# EAGLE board glowbs_3.2 (EAGLE 6.6.0)
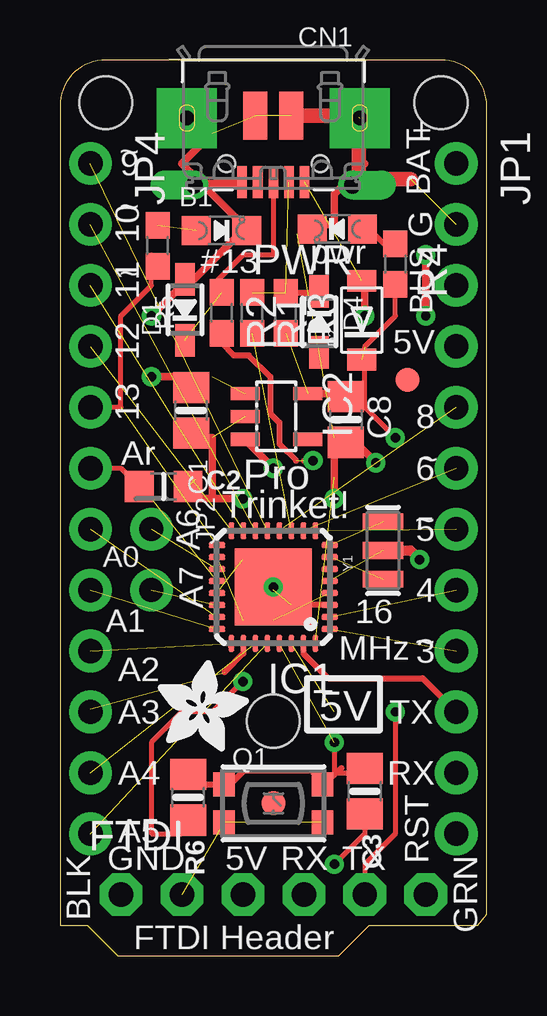
[diagram p0: board, top side]
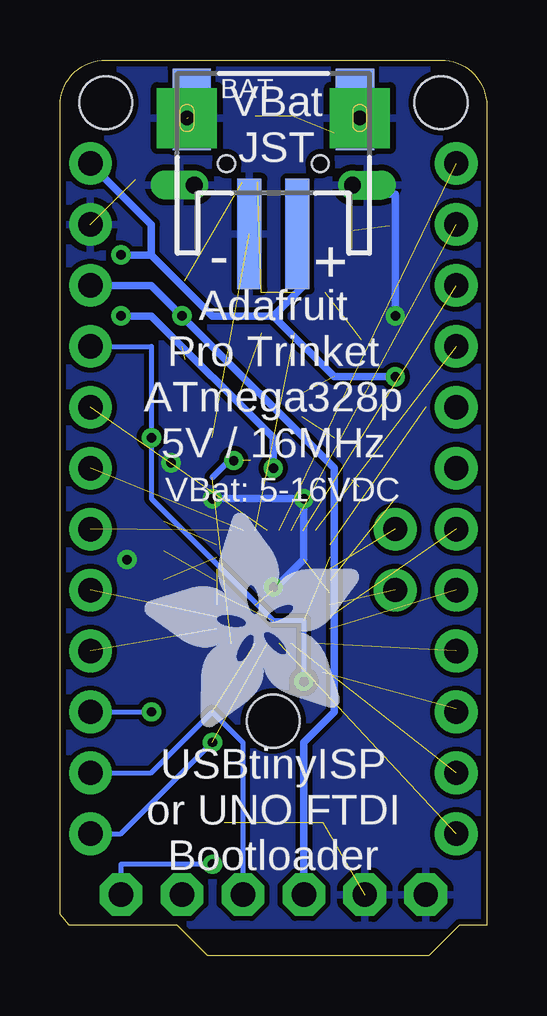
[diagram p1: board, bottom side, seen from below]

Size 17.78 x 37.34 mm. Coordinates in mm from the lower left corner, seen from the top.
Outline: 17.78,1.72 17.78,35.43 arc90 15.88,37.34 1.91,37.34 arc90 0,35.43 0,1.27 1.14,1.27 2.41,0 11.62,0 12.89,1.27 17.4,1.27 17.78,1.72
Copper layers (1*16): Top 0.035mm / dielectric 1.5mm / Bottom 0.035mm
Design rules "adafruit": minimum track width 8mil, minimum drill 15.5mil, track to track 8mil, track to pad 8mil, pad to pad 8mil, via to via 8mil, smd to smd 8mil, copper to edge 10mil, drill to drill 8mil, minimum pad ring 10mil, minimum via ring 8mil, stop-mask expansion 2mil, vias tented up to drill 20mil, thermal gap 10mil
Net classes: 1 power: width 0.305 mm
Holes 2.2 mm at 1.91,35.56 15.88,35.56 8.89,9.78

## Footprints (pad centres in the part's own frame; a part is rotated, then mirrored left to right if it is on the bottom)
CHIPLED_0805_NOOUTLINE = smd 1.2 x 1.2: A 0,-1.05; C 0,1.05
JSTPH2 = smd 1 x 4.6: 1 -1,-3.7; 2 1,-3.7 | smd 1.6 x 3.4: NC1 -3.4,1.5; NC2 3.4,1.5
0805-NO = smd 1.3 x 1.5: 1 -0.95,0; 2 0.95,0
_0805MP = smd 1.2 x 1.3: 1 -1.016,0; 2 1.016,0
0603-CAP = smd 1.1 x 1: 1 -0.85,0; 2 0.85,0
4UCONN_20329 = smd 1 x 2: BASE@1 -0.75,-2; BASE@2 0.75,-2 | smd 0.4 x 1.35: D+ 0,0.775; D- -0.65,0.775; GND 1.3,0.775; ID 0.65,0.775; VBUS -1.3,0.775 | drill 0.7 offset: SPRT@1 -3.3,0.9; SPRT@2 3.3,0.9 | drill 0.6 pad 2.5 square: SPRT@3 -3.6,-1.9; SPRT@4 3.6,-1.9 | hole 0.7: -1.95,0; 1.95,0
SOD-323 = smd 1.35 x 0.8: A 1.27,0; C -1.27,0
SOD-123FL = smd 0.91 x 1.22: A 1.637,0; C -1.637,0
1X06-CLEANBIG = drill 1.016 pad 1.778 octagon: 1 -6.35,0; 2 -3.81,0; 3 -1.27,0; 4 1.27,0; 5 3.81,0; 6 6.35,0
MLF32-TH = smd 0.7 x 0.25: 1 -2.35,1.75; 2 -2.35,1.25; 3 -2.35,0.75; 4 -2.35,0.25; 5 -2.35,-0.25; 6 -2.35,-0.75; 7 -2.35,-1.25; 8 -2.35,-1.75; 17 2.35,-1.75; 18 2.35,-1.25; 19 2.35,-0.75; 20 2.35,-0.25; 21 2.35,0.25; 22 2.35,0.75; 23 2.35,1.25; 24 2.35,1.75 | smd 0.25 x 0.7: 9 -1.75,-2.35; 10 -1.25,-2.35; 11 -0.75,-2.35; 12 -0.25,-2.35; 13 0.25,-2.35; 14 0.75,-2.35; 15 1.25,-2.35; 16 1.75,-2.35; 25 1.75,2.35; 26 1.25,2.35; 27 0.75,2.35; 28 0.25,2.35; 29 -0.25,2.35; 30 -0.75,2.35; 31 -1.25,2.35; 32 -1.75,2.35 | smd 3.2 x 3.2: TH 0,0
SOT23-5L = smd 0.55 x 1.2: 1 -0.95,-1.3; 2 0,-1.3; 3 0.95,-1.3; 4 0.95,1.3; 5 -0.95,1.3
1X12-CB = drill 1.016 pad 1.778: 1 -13.97,0; 2 -11.43,0; 3 -8.89,0; 4 -6.35,0; 5 -3.81,0; 6 -1.27,0; 7 1.27,0; 8 3.81,0; 9 6.35,0; 10 8.89,0; 11 11.43,0; 12 13.97,0
1X02_ROUND = drill 1 pad 1.778: 1 -1.27,0; 2 1.27,0
BTN_KMR2_4.6X2.8 = smd 0.9 x 1: A 2.05,0.8; A' -2.05,0.8; B 2.05,-0.8; B' -2.05,-0.8
0603-NO = smd 1.1 x 1: 1 -0.85,0; 2 0.85,0
FIDUCIAL_1MM = smd 1 x 1: 1 0,0
RESONATOR-SMD = smd 0.7 x 1.7: 1 -1.2,0; 2 0,0; 3 1.2,0

## Placement (x,y rotation side)
B1  red  [CHIPLED_0805_NOOUTLINE]  6.73,30.23 270 top
BAT  JST 2-PH  [JSTPH2]  8.89,33.78 0 bottom
C1  10uF  [0805-NO]  5.46,22.73 270 top
C2  0.1uF  [_0805MP]  4.32,19.56 0 top
C3  0.1uF  [0805-NO]  12.7,6.86 270 top
C4  1.0uF  [0603-CAP]  -9.78,-3.05 0 top  (outside the outline)
C5  4.7uF  [0603-CAP]  -9.78,-6.1 0 top  (outside the outline)
C6  0.1uF  [0603-CAP]  -9.78,-9.14 0 top  (outside the outline)
C7  0.1uF  [0603-CAP]  -9.78,-12.19 0 top  (outside the outline)
C8  10uF  [0805-NO]  11.91,22.35 270 top
CN1  [4UCONN_20329]  8.89,33.02 180 top
D1  3.6v  [SOD-323]  5.21,26.92 90 top
D2  SCHOTTKY  [SOD-123FL]  12.57,26.49 90 top
D4  3.6V  [SOD-323]  10.79,26.42 270 top
FTDI  [1X06-CLEANBIG]  8.89,2.54 0 top
IC1  ATmega328P  [MLF32-TH]  8.89,15.37 180 top
IC2  MIC5225-5v  [SOT23-5L]  9.02,22.48 270 top
JP1  [1X12-CB]  16.51,19.05 270 top
JP2  [1X02_ROUND]  3.81,16.51 270 top
JP4  [1X12-CB]  1.27,19.05 270 top
PWR  green  [CHIPLED_0805_NOOUTLINE]  11.56,30.29 90 top
Q1  reset  [BTN_KMR2_4.6X2.8]  8.89,6.35 0 top
R1  68 (0603)  [0603-NO]  8,26.8 270 top
R2  68 (0603)  [0603-NO]  6.73,26.8 270 top
R3  1.5K (0603)  [0603-NO]  9.4,26.8 270 top
R4  470 (0603)  [0603-NO]  13.97,28.83 270 top
R5  470 (0603)  [0603-NO]  4.06,29.59 270 top
R6  10K  [0805-NO]  5.33,6.6 270 top
U$1  FIDUCIAL  [FIDUCIAL_1MM]  14.48,24 0 top
U$6  FIDUCIAL  [FIDUCIAL_1MM]  8.89,6.35 0 top
U$7  [ADAFRUIT_3.5MM]  4.06,8.51 0 top
U$9  [ADAFRUIT_9MM]  5.33,9.53 90 bottom
Y1  16MHz  [RESONATOR-SMD]  13.46,16.89 90 top

## Library data of the parts
B1 BAT C1-C3 C8 CN1 D1 D4 JP2 PWR Q1 R1-R6 U$7 U$9 = microbuilder
C4 = SparkFun-Capacitors; PROD_ID: CAP-00868
C5 = SparkFun-Capacitors; PROD_ID: CAP-08280
C6 C7 = SparkFun-Capacitors; PROD_ID: CAP-00810
D2 FTDI IC2 JP1 JP4 U$1 U$6 = adafruit
IC1 = microbuilder; MPN: ATMEGA88PA-MU; OC_FARNELL: 1715491; OC_NEWARK: 15R0272
Y1 = SparkFun

## Nets
+5V: C8.1 D2.C IC1.4 IC1.6 IC1.18 IC2.5 JP1.4 R3.2 R4.2 R6.2
A0: IC1.23 JP4.7
A1: IC1.24 JP4.8
A2: IC1.25 JP4.9
A3: IC1.26 JP4.10
A4: IC1.27 JP4.11
A5: IC1.28 JP4.12
A6: IC1.19 JP2.1
A7: IC1.22 JP2.2
AREF: C2.1 IC1.20 JP4.6
D2: IC1.32 R2.2
D3: IC1.1 JP1.9
D4: IC1.2 JP1.8
D5: IC1.9 JP1.7
D6: IC1.10 JP1.6
D7: IC1.11 R1.2
D8: IC1.12 JP1.5
D9: IC1.13 JP4.1
D10: IC1.14 JP4.2
D11: IC1.15 JP4.3
D12: IC1.16 JP4.4
D13: IC1.17 JP4.5 R5.2
D+: CN1.D+ D1.C R2.1
D-: CN1.D- D4.C R1.1 R3.1
DTR/RTS: C3.2 FTDI.6
GND [power]: B1.C BAT.1 C1.2 C2.2 C8.2 CN1.BASE@1 CN1.BASE@2 CN1.GND CN1.SPRT@1 CN1.SPRT@2 CN1.SPRT@3 CN1.SPRT@4 D1.A D4.A FTDI.1 FTDI.2 IC1.3 IC1.5 IC1.21 IC1.TH IC2.2 JP1.2 PWR.C Q1.B Q1.B' Y1.2
N$1: B1.A R5.1
N$2: IC1.8 Y1.3
N$3: IC1.7 Y1.1
N$6: PWR.A R4.1
RESET: C3.1 IC1.29 JP1.12 Q1.A Q1.A' R6.1
RXD: FTDI.4 IC1.30 JP1.11
TXD: FTDI.5 IC1.31 JP1.10
VBAT [power]: BAT.2 C1.1 IC2.1 IC2.3 JP1.1
VBUS [power]: CN1.VBUS D2.A FTDI.3 JP1.3

## Tracks (layer width: path | path; a pad name or v marks a point on that pad's centre or on a via)
+5V  (via drill 0.39)  (5 unrouted)
  Top 0.203: 13.97,27.94 13.97,26.67 12.7,25.4 12.7,22.86 | 12.7,22.86 11.43,22.86 C8.1 | v7.62,11.43 6.35,10.16 5.08,10.16 3.81,8.89 3.81,5.08 5.08,5.08 R6.2 | v13.97,21.59 12.7,22.86
  Top 0.305: IC2.5 11.79,23.43 C8.1
  Top 0.406: C8.1 12.26,23.3 | R4.2 13.97,27.94
  Bottom 0.203: v7.62,11.43 7.62,13.97 8.89,13.97 13.97,19.05 v13.97,21.59 13.97,25.4 JP1.4
A0  (1 unrouted)
A1  (1 unrouted)
A2  (1 unrouted)
  Top 0.254: 7.14,12.86 IC1.25
A3  (1 unrouted)
  Top 0.254: 6.86,11.81 7.64,12.59 IC1.26 | 1.27,10.29 JP4.10
A4  (1 unrouted)
A5  (1 unrouted)
A6  (1 unrouted)
A7  (1 unrouted)
AREF  (1 unrouted)
  Top 0.203: JP4.6 2.54,20.32 C2.1 3.81,19.05
D2  (via drill 0.39)  (2 unrouted)
  Top 0.254: 10.16,20.64 v10.54,20.64 | 9.84,20.64 9.14,21.34 9.14,22.22 8.76,22.61 8.76,24.13 7.87,25.02 7.24,25.02 6.73,25.53 R2.2
  Bottom 0.254: v10.54,20.64 10.54,20.83 11.43,19.94
D3  (1 unrouted)
D4  (1 unrouted)
D5  (1 unrouted)
D6  (1 unrouted)
D7  (1 unrouted)
D8  (1 unrouted)
D9  (1 unrouted)
D10  (1 unrouted)
D11  (1 unrouted)
D12  (1 unrouted)
D13  (1 unrouted)
  Top 0.203: JP4.5 2.54,22.86 2.54,26.67 3.81,27.94 3.81,29.21 R5.2
D+  (1 unrouted)
  Top 0.203: CN1.D+ 8.89,29.21 7.62,29.21 6.35,27.94 R2.1
D-  (2 unrouted)
  Top 0.254: R3.1 10.76,27.65 D4.C
DTR/RTS  (via drill 0.39)
  Top 0.203: v11.43,3.81 12.7,5.08 C3.2 12.7,6.35
  Top 0.254: 12.8,5.91 C3.2
  Bottom 0.203: FTDI.6 15.24,3.81 v11.43,3.81
GND  (via drill 0.39)  (14 unrouted)
  Top 0.254: IC1.3 9.64,14.62
  Top 0.305: 9.14,15.62 IC1.TH | 12.3,21.4 v13.16,20.55 | 5.59,28.19 7.49,30.1 B1.C 7.62,30.48 5.08,33.02 6.35,34.29 CN1.SPRT@4 | 12.35,35.02 12.39,35.02 | 6.35,19.05 5.08,19.05 C2.2 | 6.35,19.05 6.35,21.59 5.08,21.59 C1.2 | v11.43,19.05 11.43,21.59 C8.2 | 6.35,19.05 v7.62,19.05 | PWR.C 10.16,30.48 11.43,30.48 11.43,31.75 12.7,33.02 12.45,33.02 | v3.81,26.67 5.08,27.94 D1.A
  Top 0.406: Y1.2 14.61,16.89 v14.99,16.51 | CN1.GND 7.47,32.12 CN1.SPRT@2 | 5.72,19.85 5.63,19.85
  Top 0.61: 5.39,35.02 CN1.SPRT@4 | CN1.BASE@1 12.35,35.02 12.45,34.93 | CN1.SPRT@1 12.45,32.38 | 12.45,32.38 12.45,33.02 12.45,34.8 | 12.45,32.38 14.61,32.38
  Bottom 0.305: v11.43,19.05 v7.62,19.05 7.62,16.51 8.89,15.24 IC1.TH | v3.81,26.67 3.81,31.75 5.08,31.75 CN1.SPRT@2
  other vias: 8.89,15.37
  pour Bottom: 0,38.1 0,1.27 17.78,1.27 17.78,38.1
N$1  (1 unrouted)
N$2  (1 unrouted)
N$3  (1 unrouted)
N$6
  Top 0.203: R4.1 13.97,29.21 12.7,30.48 PWR.A
RESET  (via drill 0.39)  (1 unrouted)
  Top 0.203: 11.43,7.62 12.7,7.62 C3.1 | v11.43,8.89 11.43,7.62 | 11.43,7.62 11.46,7.59
  Top 0.254: 10.34,7.75 10.47,7.75 Q1.A 11.46,7.59 11.73,7.81 | R6.1 5.74,7.15 Q1.A' 7.09,7.15 7.69,7.75
  Top 0.305: 7.69,7.75 10.34,7.75
  Bottom 0.203: v11.43,8.89 15.24,5.08 JP1.12
RXD  (1 unrouted)
  Bottom 0.203: FTDI.4 10.16,8.89 11.43,10.16 13.97,7.62 JP1.11
TXD  (via drill 0.39)
  Top 0.203: FTDI.5 12.7,3.81 13.97,5.08 v13.97,10.16
  Top 0.254: IC1.31 10.14,12.59 11.18,11.56 15.11,11.56 JP1.10
  Bottom 0.203: JP1.10 v13.97,10.16
VBAT  (via drill 0.39)  (1 unrouted)
  Top 0.305: v8.89,20.32 7.62,21.59 IC2.3 | v15.24,29.21 v15.24,26.67 | v3.81,24.13 5.08,24.13 C1.1
  Top 0.406: C1.1 5.72,23.43
  Bottom 0.305: JP1.1 13.97,30.48 13.97,29.21 | 13.97,29.21 11.43,26.67 8.89,26.67 | 8.89,26.67 7.62,27.94 7.62,29.21 BAT.2 | v8.89,20.32 8.89,21.59 13.97,26.67 v15.24,26.67 | 13.97,29.21 v15.24,29.21 | v3.81,24.13 6.35,24.13 8.89,26.67
VBUS  (via drill 0.39)  (1 unrouted)
  Top 0.305: v12.7,26.67 12.7,27.94 D2.A
  Bottom 0.305: JP1.3 13.97,27.94 v12.7,26.67 6.35,20.32 6.35,10.16 7.62,8.89 FTDI.3

## Text on the board
tPlace: + | 9 | ~ | ~ | BAT | G | 10 | 11 | pwr | BUS | ~ | #13 | 12 | 5V | 13 | 8 | Ar | Pro | 6 | ~ | Trinket! | 5 | ~ | A6 | A0 | 4 | A1 | A7 | 16 / MHz | ~ | A2 | 3 | A3 | 5V | TX | A4 | RX | RST | A5 | BLK | GND | 5V | RX | TX | GRN | FTDI Header
bPlace: VBat / JST | + | - | Adafruit / Pro Trinket / ATmega328p / 5V / 16MHz | VBat: 5-16VDC | USBtinyISP / or UNO FTDI / Bootloader